# Altium PCB sorad.pcbdoc
Units mil, origin at the board's own origin, x right, y up, seen from the top; angles counter-clockwise.
Board outline 4875 x 2875 mil, 2 copper layers (Top Layer, Bottom Layer); 124 components, 109 nets, 639 pads, 153 vias.
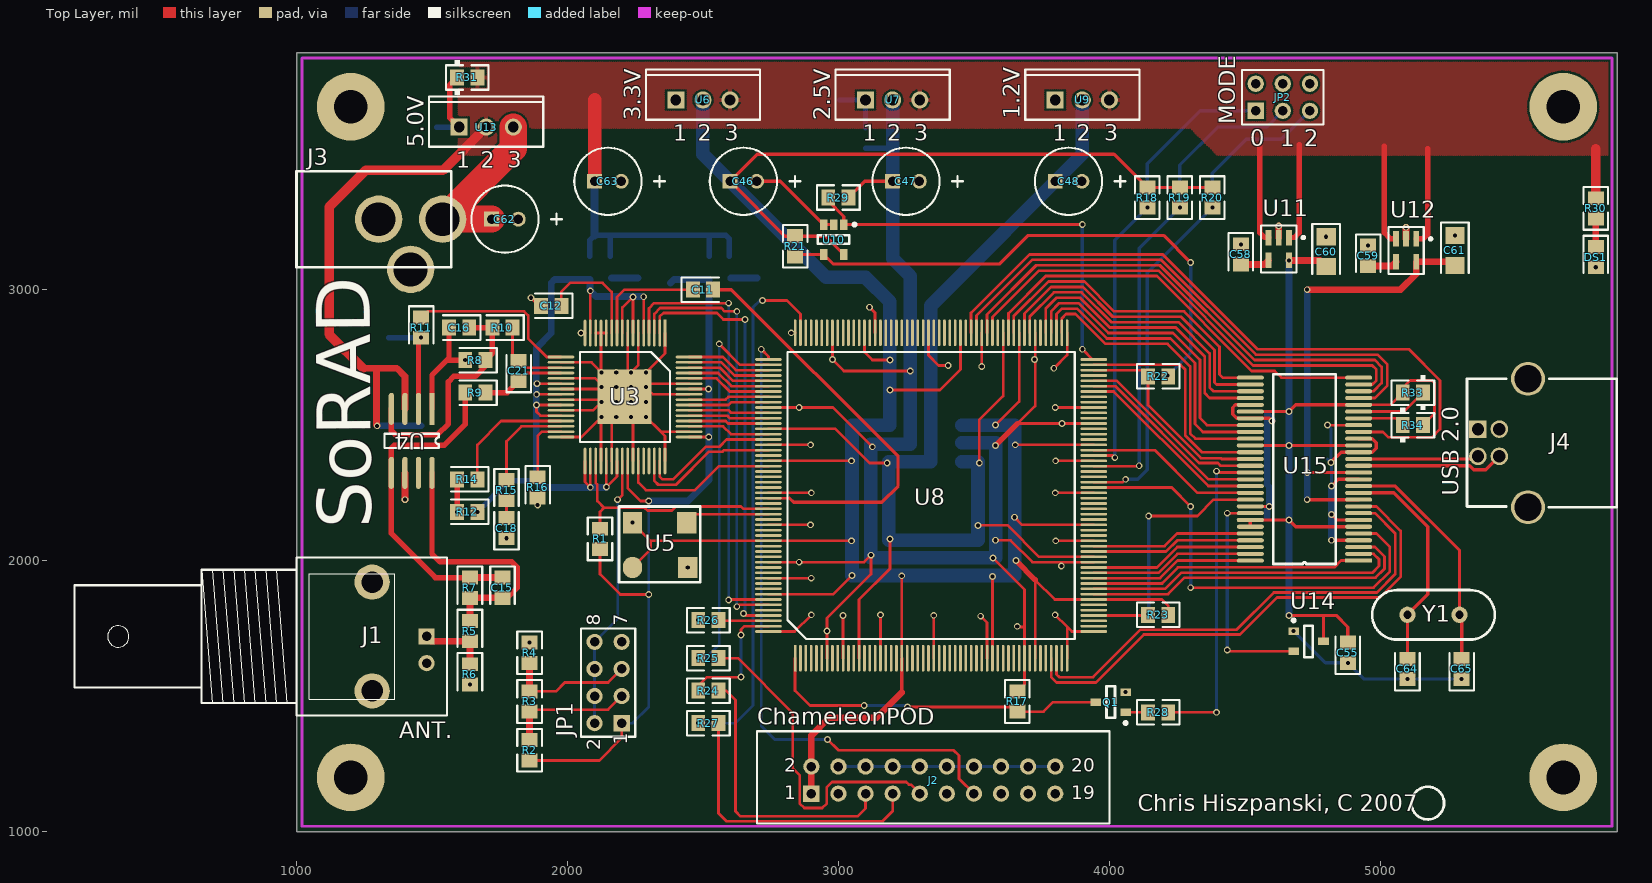
[diagram p0: Top Layer view]
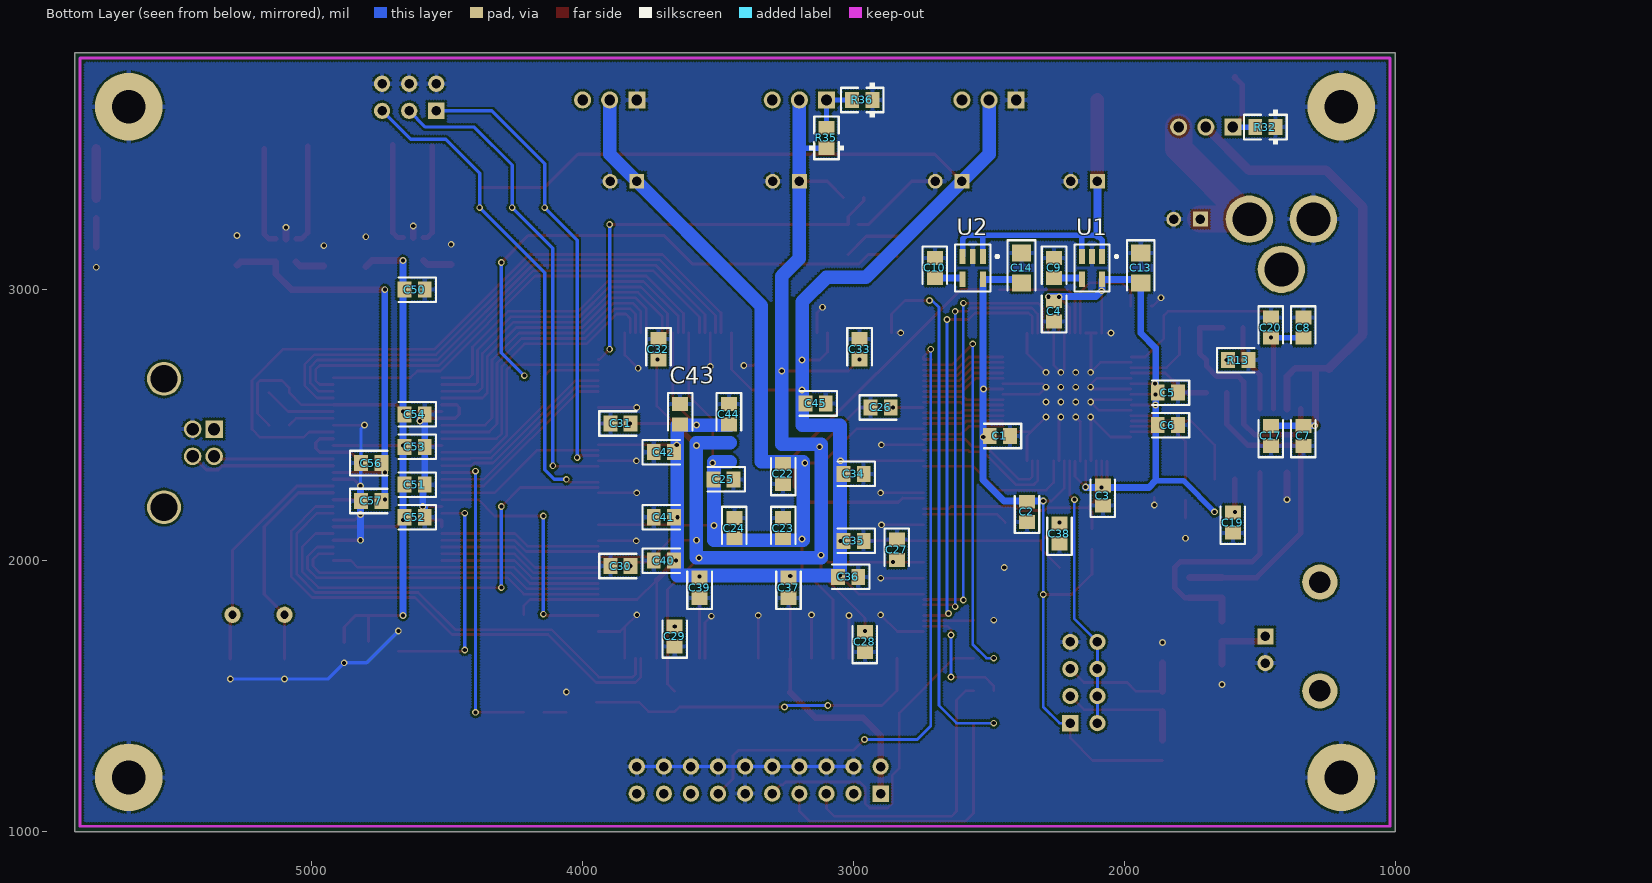
[diagram p1: Bottom Layer view, seen from below]

## Layer stack, top to bottom
Top Layer: signal copper 1.4
Dielectric: dielectric 12.6, FR-4, Dk 4.8
Bottom Layer: signal copper 1.4

## Board outline
1000,1000 5875,1000 5875,3875 1000,3875

## Design rules (kind name [scope] priority, off if disabled: settings)
Clearance [All] p1: gap=8
ComponentClearance [All] p1: gap=10 collisioncheckmode=2
HoleSize [All] p1: absolutevalues=TRUE maxlimit=125 minlimit=15 maxpercent=80.000 minpercent=20.000
MinimumAnnularRing [All] p1: minimumring=5
PolygonConnect [All] p1: connectstyle=Relief reliefconductorwidth=15 reliefentries=4 polygonreliefangle="90 Angle"
RoutingLayers [All] p1: top layer=Horizontal bottom layer=Vertical
RoutingVias [All] p1: holewidth=15 width=25 viastyle="Through Hole" minholewidth=15 minwidth=25 maxholewidth=125 maxwidth=200
SolderMaskExpansion [All] p1: expansion=3
TestPointUsage [All] p1: valid=0 allowmultiple=FALSE
Testpoint [All] p1: side=15 testpointundercomponent=TRUE minsize=40 maxsize=100 preferedsize=60 minholesize=0 maxholesize=40 preferedholesize=32 testpointgrid=1 style=1023 order=1234567890
Width Width_vcc5 [InNet('VCC5')] p1: maxlimit=100 minlimit=6 preferedwidth=100 toplayer_prefwidth=50 bottomlayer_prefwidth=20 minimp=50.000000 maximp=50.000000 favimp=50.000000
Width Width_power [InNet('VCCA') or InNet('VCCD') or InNet('USB_VCCA') or InNet('USB_VCCD') or InNet('VCC12') or InNet('VCC25') or InNet('VCC33')] p2: maxlimit=100 minlimit=10 preferedwidth=25 toplayer_prefwidth=12 bottomlayer_prefwidth=20 minimp=50.000000 maximp=50.000000 favimp=50.000000
Width [All] p3: maxlimit=150 minlimit=6 preferedwidth=8 toplayer_prefwidth=12 bottomlayer_prefwidth=20 minimp=50.000000 maximp=50.000000 favimp=50.000000
15 further rules are at their usual default settings.

## Classes and differential pairs
component class S3: C50 C51 C52 C53 C54 C55 C56 C57 C58 C59 C60 C61 C62 C63 C64 C65 DS1 J3 J4 R30 R31 R32 R33 R34 U11 U12 U13 U14 U15 Y1
component class S2: C22 C23 C24 C25 C26 C27 C28 C29 C30 C31 C32 C33 C34 C35 C36 C37 C38 C39 C40 C41 C42 C43 C44 C45 C46 C47 C48 J2 J? JP2 JP? Q1 R17 R18 R19 R20 R21 R22 R23 R24 R25 R26 R27 R28 R29 R35 R36 U5 U6 U7 U8 U9 U10
component class S1: C1 C2 C3 C4 C5 C6 C7 C8 C9 C10 C11 C12 C13 C14 C15 C16 C17 C18 C19 C20 C21 J1 JP1 R1 R2 R3 R4 R5 R6 R7 R8 R9 R10 R11 R12 R13 R14 R15 R16 U1 U2 U3 U4

## Components (designator, comment, footprint, x,y, rotation, side; value= is the part's Value field where it differs from the comment)
C1 "0.1uF" CC2012-0805 2460,2460 r0 bottom
C2 "0.1uF" CC2012-0805 2360,2180 r90 bottom
C3 "0.1uF" CC2012-0805 2080,2240 r90 bottom
C4 "0.1uF" CC2012-0805 2260,2920 r90 bottom
C5 "0.1uF" CC2012-0805 1840,2620 r0 bottom
C6 "0.1uF" CC2012-0805 1840,2500 r0 bottom
C7 "0.1uF" CC2012-0805 1340,2460 r90 bottom
C8 "0.1uF" CC2012-0805 1340,2860 r270 bottom
C9 "0.01uF" CC2012-0805 2260,3080 r270 bottom
C10 "0.01uF" CC2012-0805 2700,3080 r270 bottom
C11 "0.01uF" CC2012-0805 2500,3000 r0 top
C12 "0.01uF" CC2012-0805 1940,2940 r180 top
C13 "2.2uF" CC3216-1206 1940,3080 r270 bottom
C14 "2.2uF" CC3216-1206 2380,3080 r270 bottom
C15 "2pF" CC2012-0805 1760,1900 r270 top
C16 "2pF" CC2012-0805 1600,2860 r180 top
C17 "1uF" CC2012-0805 1460,2460 r90 bottom
C18 "1uF" CC2012-0805 1775,2120 r90 top
C19 "1uF" CC2012-0805 1600,2140 r90 bottom
C20 "1uF" CC2012-0805 1460,2860 r270 bottom
C21 "56pF" CC2012-0805 1820,2700 r90 top
C22 "0.1uF" CC2012-0805 3260,2320 r90 bottom
C23 "0.1uF" CC2012-0805 3260,2120 r270 bottom
C24 "0.1uF" CC2012-0805 3440,2120 r270 bottom
C25 "0.1uF" CC2012-0805 3480,2300 r0 bottom
C26 "0.1uF" CC2012-0805 2900,2565.2 r180 bottom
C27 "0.1uF" CC2012-0805 2840,2040 r270 bottom
C28 "0.1uF" CC2012-0805 2958.11,1700 r90 bottom
C29 "0.1uF" CC2012-0805 3660,1720 r90 bottom
C30 "0.1uF" CC2012-0805 3860,1980 r180 bottom
C31 "0.1uF" CC2012-0805 3860,2506.14 r180 bottom
C32 "0.1uF" CC2012-0805 3720,2780 r270 bottom
C33 "0.1uF" CC2012-0805 2977.8,2780 r270 bottom
C34 "0.1uF" CC2012-0805 3000,2320 r0 bottom
C35 "0.1uF" CC2012-0805 3000,2073.07 r0 bottom
C36 "0.1uF" CC2012-0805 3020,1940 r0 bottom
C37 "0.1uF" CC2012-0805 3240,1900 r90 bottom
C38 "0.1uF" CC2012-0805 2240,2100 r90 bottom
C39 "0.1uF" CC2012-0805 3568.35,1900 r90 bottom
C40 "0.1uF" CC2012-0805 3700,2000 r180 bottom
C41 "0.1uF" CC2012-0805 3700,2160 r180 bottom
C42 "0.1uF" CC2012-0805 3700,2400 r180 bottom
C43 "0.1uF" CC2012-0805 3640,2540 r270 bottom
C44 "0.1uF" CC2012-0805 3460,2540 r270 bottom
C45 "0.1uF" CC2012-0805 3140,2580 r0 bottom
C46 "22uF" RB6.3 2600,3400 r0 top
C47 "22uF" RB6.3 3200,3400 r0 top
C48 "22uF" RB6.3 3800,3400 r0 top
C50 "0.1uF" CC2012-0805 4620,3000 r0 bottom (schematic designator C53)
C51 "0.1uF" CC2012-0805 4620,2280 r0 bottom (schematic designator C54)
C52 "0.1uF" CC2012-0805 4620,2160 r0 bottom (schematic designator C55)
C53 "0.1uF" CC2012-0805 4620,2420 r0 bottom (schematic designator C56)
C54 "0.1uF" CC2012-0805 4620,2540 r0 bottom (schematic designator C57)
C55 "0.1uF" CC2012-0805 4880,1660 r90 top (schematic designator C58)
C56 "0.1uF" CC2012-0805 4780,2360 r180 bottom (schematic designator C59)
C57 "0.1uF" CC2012-0805 4780,2220 r180 bottom (schematic designator C60)
C58 "0.01uF" CC2012-0805 4485,3130 r270 top (schematic designator C61)
C59 "0.01uF" CC2012-0805 4955,3125 r270 top (schematic designator C62)
C60 "2.2uF" CC3216-1206 4800,3140 r270 top (schematic designator C63)
C61 "2.2uF" CC3216-1206 5275,3145 r270 top (schematic designator C64)
C62 "22uF" RB6.3 1720,3260 r0 top (schematic designator C65)
C63 "22uF" RB6.3 2100,3400 r0 top (schematic designator C66)
C64 "12pF" CC2012-0805 5100,1600 r90 top (schematic designator C67)
C65 "12pF" CC2012-0805 5300,1600 r90 top (schematic designator C68)
DS1 "PWR" CC2012-0805 5795,3120 r270 top
J1 "BNC" "BNC_RA CON" 1480,1720 r0 top locked
J2 "ChameleonPOD" HDR2X10 2900,1140 r0 top
J3 "PJ-002B" PJ-002B 1000,3260 r180 top locked
J4 "USB B RA" AU-Y1007-R 5360,2385 r90 top locked
JP1 "Header 4X2" HDR2X4 2200,1400 r90 top
JP2 "MODE" HDR2X3 4540,3660 r0 top
Q1 "2N7002" SOT-23-3 4060,1440 r180 top
R1 "4.7K" CR2012-0805 2120,2080 r270 top
R2 "4.7K" CR2012-0805 1860,1300 r270 top
R3 "4.7K" CR2012-0805 1860,1480 r270 top
R4 "4.7K" CR2012-0805 1860,1660 r270 top
R5 "118" CC2012-0805 1640,1740 r270 top
R6 "65" CC2012-0805 1640,1580 r270 top
R7 "1.3K" CC2012-0805 1640,1900 r270 top
R8 "1.3K" CC2012-0805 1660,2740 r180 top
R9 "25" CC2012-0805 1660,2620 r180 top
R10 "25" CC2012-0805 1760,2860 r180 top
R11 "10" CC2012-0805 1460,2860 r270 top
R12 "2K" CC2012-0805 1630,2180 r180 top
R13 "147" CC2012-0805 1580,2740 r180 bottom
R14 "1" CC2012-0805 1630,2300 r180 top
R15 "1" CC2012-0805 1775,2260 r270 top
R16 "56.2K" CC2012-0805 1890,2270 r270 top
R17 "4.7K" CR2012-0805 3660,1480 r90 top
R18 "4.7K" CR2012-0805 4140,3340 r270 top
R19 "4.7K" CR2012-0805 4260,3340 r270 top
R20 "4.7K" CR2012-0805 4380,3340 r270 top
R21 "4.7K" CR2012-0805 2840,3160 r90 top
R22 "4.7K" CR2012-0805 4180,2680 r0 top
R23 "4.7K" CR2012-0805 4180,1800 r0 top
R24 "330" CR2012-0805 2520,1520 r0 top
R25 "330" CR2012-0805 2520,1640 r0 top
R26 "330" CR2012-0805 2520,1780 r0 top
R27 "330" CR2012-0805 2520,1400 r0 top
R28 "330" CR2012-0805 4180,1440 r180 top
R29 "330" CR2012-0805 3000,3340 r0 top
R30 "330" CR2012-0805 5795,3300 r90 top
R31 "121" CC2012-0805 1630,3783.03 r0 top
R32 "363" CC2012-0805 1480,3600 r0 bottom
R33 "2.2K" CC2012-0805 5120,2620 r180 top
R34 "2.2K" CC2012-0805 5120,2500 r0 top
R35 "121" CC2012-0805 3100,3560 r90 bottom
R36 "121" CC2012-0805 2968,3700 r0 bottom
U1 "TPS79933" SO-G5/P.95 2120,3080 r0 bottom
U2 "TPS79933" SO-G5/P.95 2560,3080 r0 bottom
U3 "" HQFP64 2360,2840 r270 top locked
U4 "THS4501" SOIC8 1500,2560 r270 top
U5 "25 MHz" CSX750FB 2240,2140 r0 top (schematic designator U6)
U6 "LM1086CT-3.3" SFM-T3/A4.7V 2500,3700 r0 top
U7 "LM1086CT-ADJ" SFM-T3/A4.7V 3200,3700 r0 top
U8 "XC3S500E" PQFP208 2840,1640 r90 top locked
U9 "LM1086CT-ADJ" SFM-T3/A4.7V 3900,3700 r0 top
U10 "SN74AHC1G125" SOT-23-6 3020,3240 r270 top
U11 "TPS79933" SO-G5/P.95 4625,3150 r180 top
U12 "TPS79933" SO-G5/P.95 5095,3145 r180 top
U13 "LM1085IT-ADJ" SFM-T3/A4.7V 1700,3600 r0 top
U14 "MAX809" SOT-23-3 4680,1740 r0 top
U15 "CY7C68013A" SSOP56 4920,2000 r180 top locked
Y1 "24MHz" HC49US 5100,1800 r0 top

## Footprints (in the part's own frame and the unit in brackets; to place one, negate y for a bottom-side part, rotate by r counter-clockwise, add the part's x,y. Pads: shape width x height; smd on the part's side, far side on the other; paste and mask are expansions set on the pad)
AU-Y1007-R [mil]
  rect 65x65 hole 45: 1(100,0)
  round 65 hole 45: 2(0,0) 3(0,-79) 4(100,-79)
  round 125 hole 100: ""(-188,-185) ""(286,-185)
  silkscreen extent -188,-512 286,40
"BNC_RA CON" [mil]
  rect 60x60 hole 35: 1(0,0)
  round 60 hole 35: 2(0,-98.42)
  round 130 hole 79: ""(-200.79,-200.79) ""(-200.79,200.79)
  silkscreen extent -1299,-291 75,291
CC2012-0805 [mm]
  rect 1.3x1.5 smd: 1(-0.95,0) 2(0.95,0)
  silkscreen extent -2,-1.15 1.5,1.15
CC3216-1206 [mm]
  rect 1.6x1.8 smd: 1(-1.4,0) 2(1.4,0)
  silkscreen extent -2.6,-1.3 2.1,1.3
CR2012-0805 [mm]
  rect 1.3x1.5 smd: 1(-0.95,0) 2(0.95,0)
  silkscreen extent -2,-1.15 2,1.15
CSX750FB [mm]
  oval 1.8x2 smd: 1(0,-4.2)
  rect 1.8x2 smd: 2(5.18,-4.2) 3(5.08,0) 4(0,0)
  silkscreen extent -1.27,-5.59 6.35,1.52
HC49US [mil]
  round 60 hole 30: 1(0,0) 2(192.13,0)
  silkscreen extent -130,-92 322,92
HDR2X3 [mil] "Connector; Header; 3x2 Position"
  rect 60x60 hole 35: 1(0,0)
  round 60 hole 35: 2(0,100) 3(100,0) 4(100,100) 5(200,0) 6(200,100)
  silkscreen extent -50,-50 250,150
HDR2X4 [mil] "Connector; Header; 4x2 Position"
  rect 60x60 hole 35: 1(0,0)
  round 60 hole 35: 2(0,100) 3(100,0) 4(100,100) 5(200,0) 6(200,100) 7(300,0) 8(300,100)
  silkscreen extent -50,-50 350,150
HDR2X10 [mil]
  rect 60x60 hole 35: 1(0,0)
  round 60 hole 35: 2(0,100) 3(100,0) 4(100,100) 5(200,0) 6(200,100) 7(300,0) 8(300,100) 9(400,0) 10(400,100) 11(500,0) 12(500,100) 13(600,0) 14(600,100) 15(700,0) 16(700,100) 17(800,0) 18(800,100) 19(900,0) 20(900,100)
  silkscreen extent -200,-110 1100,230
HQFP64 [mm]
  rect 2.5x0.25 smd: 1(0,0)
  oval 2.5x0.25 smd: 2(0,-0.5) 3(0,-1) 4(0,-1.5) 5(0,-2) 6(0,-2.5) 7(0,-3) 8(0,-3.5) 9(0,-4) 10(0,-4.5) 11(0,-5) 12(0,-5.5) 13(0,-6) 14(0,-6.5) 15(0,-7) 16(0,-7.5) 33(12,-7.5) 34(12,-7) 35(12,-6.5) 36(12,-6) 37(12,-5.5) 38(12,-5) 39(12,-4.5) 40(12,-4) 41(12,-3.5) 42(12,-3) 43(12,-2.5) 44(12,-2) 45(12,-1.5) 46(12,-1) 47(12,-0.5) 48(12,0)
  oval 0.25x2.5 smd: 17(2.25,-9.75) 18(2.75,-9.75) 19(3.25,-9.75) 20(3.75,-9.75) 21(4.25,-9.75) 22(4.75,-9.75) 23(5.25,-9.75) 24(5.75,-9.75) 25(6.25,-9.75) 26(6.75,-9.75) 27(7.25,-9.75) 28(7.75,-9.75) 29(8.25,-9.75) 30(8.75,-9.75) 31(9.25,-9.75) 32(9.75,-9.75) 49(9.75,2.25) 50(9.25,2.25) 51(8.75,2.25) 52(8.25,2.25) 53(7.75,2.25) 54(7.25,2.25) 55(6.75,2.25) 56(6.25,2.25) 57(5.75,2.25) 58(5.25,2.25) 59(4.75,2.25) 60(4.25,2.25) 61(3.75,2.25) 62(3.25,2.25) 63(2.75,2.25) 64(2.25,2.25)
  silkscreen extent 1.79,-7.96 10.21,0.47
PJ-002B [mm]
  round 4.445 hole 3.175: 1(-13.7,0) 2(-7.7,0) 3(-10.7,4.7)
  silkscreen extent -14.5,-4.5 0,4.5
PQFP208 [mm]
  rect 2.5x0.25 smd: 1(0,0)
  oval 2.5x0.25 smd: 2(0,-0.5) 3(0,-1) 4(0,-1.5) 5(0,-2) 6(0,-2.5) 7(0,-3) 8(0,-3.5) 9(0,-4) 10(0,-4.5) 11(0,-5) 12(0,-5.5) 13(0,-6) 14(0,-6.5) 15(0,-7) 16(0,-7.5) 17(0,-8) 18(0,-8.5) 19(0,-9) 20(0,-9.5) 21(0,-10) 22(0,-10.5) 23(0,-11) 24(0,-11.5) 25(0,-12) 26(0,-12.5) 27(0,-13) 28(0,-13.5) 29(0,-14) 30(0,-14.5) 31(0,-15) 32(0,-15.5) 33(0,-16) 34(0,-16.5) 35(0,-17) 36(0,-17.5) 37(0,-18) 38(0,-18.5) 39(0,-19) 40(0,-19.5) 41(0,-20) 42(0,-20.5) 43(0,-21) 44(0,-21.5) 45(0,-22) 46(0,-22.5) 47(0,-23) 48(0,-23.5) 49(0,-24) 50(0,-24.5) 51(0,-25) 52(0,-25.5) 105(30.5,-25.5) 106(30.5,-25) 107(30.5,-24.5) 108(30.5,-24) 109(30.5,-23.5) 110(30.5,-23) 111(30.5,-22.5) 112(30.5,-22) 113(30.5,-21.5) 114(30.5,-21) 115(30.5,-20.5) 116(30.5,-20) 117(30.5,-19.5) 118(30.5,-19) 119(30.5,-18.5) 120(30.5,-18) 121(30.5,-17.5) 122(30.5,-17) 123(30.5,-16.5) 124(30.5,-16) 125(30.5,-15.5) 126(30.5,-15) 127(30.5,-14.5) 128(30.5,-14) 129(30.5,-13.5) 130(30.5,-13) 131(30.5,-12.5) 132(30.5,-12) 133(30.5,-11.5) 134(30.5,-11) 135(30.5,-10.5) 136(30.5,-10) 137(30.5,-9.5) 138(30.5,-9) 139(30.5,-8.5) 140(30.5,-8) 141(30.5,-7.5) 142(30.5,-7) 143(30.5,-6.5) 144(30.5,-6) 145(30.5,-5.5) 146(30.5,-5) 147(30.5,-4.5) 148(30.5,-4) 149(30.5,-3.5) 150(30.5,-3) 151(30.5,-2.5) 152(30.5,-2) 153(30.5,-1.5) 154(30.5,-1) 155(30.5,-0.5) 156(30.5,0)
  oval 0.25x2.5 smd: 53(2.5,-28) 54(3,-28) 55(3.5,-28) 56(4,-28) 57(4.5,-28) 58(5,-28) 59(5.5,-28) 60(6,-28) 61(6.5,-28) 62(7,-28) 63(7.5,-28) 64(8,-28) 65(8.5,-28) 66(9,-28) 67(9.5,-28) 68(10,-28) 69(10.5,-28) 70(11,-28) 71(11.5,-28) 72(12,-28) 73(12.5,-28) 74(13,-28) 75(13.5,-28) 76(14,-28) 77(14.5,-28) 78(15,-28) 79(15.5,-28) 80(16,-28) 81(16.5,-28) 82(17,-28) 83(17.5,-28) 84(18,-28) 85(18.5,-28) 86(19,-28) 87(19.5,-28) 88(20,-28) 89(20.5,-28) 90(21,-28) 91(21.5,-28) 92(22,-28) 93(22.5,-28) 94(23,-28) 95(23.5,-28) 96(24,-28) 97(24.5,-28) 98(25,-28) 99(25.5,-28) 100(26,-28) 101(26.5,-28) 102(27,-28) 103(27.5,-28) 104(28,-28) 157(28,2.5) 158(27.5,2.5) 159(27,2.5) 160(26.5,2.5) 161(26,2.5) 162(25.5,2.5) 163(25,2.5) 164(24.5,2.5) 165(24,2.5) 166(23.5,2.5) 167(23,2.5) 168(22.5,2.5) 169(22,2.5) 170(21.5,2.5) 171(21,2.5) 172(20.5,2.5) 173(20,2.5) 174(19.5,2.5) 175(19,2.5) 176(18.5,2.5) 177(18,2.5) 178(17.5,2.5) 179(17,2.5) 180(16.5,2.5) 181(16,2.5) 182(15.5,2.5) 183(15,2.5) 184(14.5,2.5) 185(14,2.5) 186(13.5,2.5) 187(13,2.5) 188(12.5,2.5) 189(12,2.5) 190(11.5,2.5) 191(11,2.5) 192(10.5,2.5) 193(10,2.5) 194(9.5,2.5) 195(9,2.5) 196(8.5,2.5) 197(8,2.5) 198(7.5,2.5) 199(7,2.5) 200(6.5,2.5) 201(6,2.5) 202(5.5,2.5) 203(5,2.5) 204(4.5,2.5) 205(4,2.5) 206(3.5,2.5) 207(3,2.5) 208(2.5,2.5)
  silkscreen extent 1.79,-26.21 28.71,0.72
RB6.3 [mil]
  rect 55x55 hole 35: 1(0,0)
  round 55 hole 35: 2(98.43,0)
  silkscreen extent -75,-124 260,124
SFM-T3/A4.7V [mm]
  rect 1.6x1.6 hole 1: 1(-2.54,0)
  round 1.6 hole 1: 2(0,0) 3(2.54,0)
  silkscreen extent -5.35,-1.85 5.35,2.85
SO-G5/P.95 [mm]
  rect 0.55x1.45 smd: 1(-0.95,-1.075) 2(0,-1.075) 3(0.95,-1.075) 4(0.95,1.075) 5(-0.95,1.075)
  silkscreen extent -2.42,-2.2 1.65,2.2
SOIC8 [mm]
  rect 3x0.5 smd: 1(0,0)
  oval 3x0.5 smd: 2(0,-1.27) 3(0,-2.54) 4(0,-3.81) 5(6,-3.81) 6(6,-2.54) 7(6,-1.27) 8(6,0)
  silkscreen extent 2.34,-4.44 3.67,0.64
SOT-23-3 [mm]
  rect 1x0.7 smd: 1(0,0) 2(0,-1.9) 3(2.8,-0.95)
  silkscreen extent -0.15,-2.45 1.8,1.15
SOT-23-6 [mm]
  rect 1x0.7 smd: 1(0,0) 2(0,-0.95) 3(0,-1.9) 4(2.8,-1.9) 5(2.8,0)
  silkscreen extent -0.15,-2.45 1.8,1.15
SSOP56 [mil]
  rect 100x15 smd: 1(0,0)
  oval 100x15 smd: 2(0,-25) 3(0,-50) 4(0,-75) 5(0,-100) 6(0,-125) 7(0,-150) 8(0,-175) 9(0,-200) 10(0,-225) 11(0,-250) 12(0,-275) 13(0,-300) 14(0,-325) 15(0,-350) 16(0,-375) 17(0,-400) 18(0,-425) 19(0,-450) 20(0,-475) 21(0,-500) 22(0,-525) 23(0,-550) 24(0,-575) 25(0,-600) 26(0,-625) 27(0,-650) 28(0,-675) 29(400,-675) 30(400,-650) 31(400,-625) 32(400,-600) 33(400,-575) 34(400,-550) 35(400,-525) 36(400,-500) 37(400,-475) 38(400,-450) 39(400,-425) 40(400,-400) 41(400,-375) 42(400,-350) 43(400,-325) 44(400,-300) 45(400,-275) 46(400,-250) 47(400,-225) 48(400,-200) 49(400,-175) 50(400,-150) 51(400,-125) 52(400,-100) 53(400,-75) 54(400,-50) 55(400,-25) 56(400,0)
  silkscreen extent 85,-688 315,13

## Part data
C1 C2 C3 C4 C5 C6 C7 C8 C9 C10 C11 C12 C13 C14 C15 C16 C17 C18 C19 C20 C21 C22 C23 C24 C25 C26 C27 C28 C29 C30 C31 C32 C33 C34 C35 C36 C37 C38 C39 C40 C41 C42 C43 C44 C45 C46 C47 C48 C50 C51 C52 C53 C54 C55 C56 C57 C58 C59 C60 C61 C64 C65: library part Cap, "Capacitor"
C62 C63: library part "Cap Pol1", "Polarized Capacitor (Radial)"
DS1: library part LED0, "Typical INFRARED GaAs LED"
J1: "BNC Elbow Connector"
J2: library part "Header 10X2", "Header, 10-Pin, Dual row"
J3: library part PB-002B, "R/A PCB Mount Power Jack"
J4: library part "Header 4", "Header, 4-Pin"
JP1: "Header, 4-Pin, Dual row"
JP2: library part "Header 3X2", "Header, 3-Pin, Dual row"
Q1: library part MOSFET-N, "N-Channel MOSFET"
R1 R2 R3 R4 R5 R6 R7 R8 R9 R10 R11 R12 R13 R14 R15 R16 R17 R18 R19 R20 R21 R22 R23 R24 R25 R26 R27 R28 R29 R30 R31 R32 R35 R36: library part Res1, "Resistor"
U1 U2 U7 U9 U11 U12: library part TPS799xx, "LDO Voltage Regulator"
U3: library part ADS5520, "ADC 12BIT 125MSPS"
U4: "Differential Amplifier"
U5: library part CWX815-100.0M, "CWX815-100.0M"
U6: library part LM317HVT, "3-Terminal Adjustable Regulator"
U8: "Xilinx Spartan-3E FPGA"
U10: "Single 3-state buffer"
U13: library part LM1086CT, "Voltage Regulator"
U14: "POR Supervisory Circuit"
U15: "EZ-USB FX2LP USB Microcontroller (56-SSOP)"
Y1: library part XTAL, "Crystal Oscillator"

## Free pads (board coordinates)
  rect 200x200 smd: 0(2210,2605)
  round 250 hole 125: ""(1200,1200) ""(1200,3675) ""(5675,1200) ""(5675,3675)

## Via types
v1: diameter 25, hole 15, Top Layer to Bottom Layer, 153 vias

## Nets (pads, with @x,y where several pads share a name; then routed paths per layer and width w, separated by ;. In a path a pad name is that pad's centre, name@x,y a point inside that pad or via, vN(x,y) a via of type N, cw(c..) or ccw(c..) an arc to the next point about the centre after c; other vN are vias at no path point)
GND: C1.1 C2.1 C3.1 C4.1 C5.1 C6.1 C7.1 C8.1 C9.1 C10.1 C12.2 C13.1 C14.1 C17.1 C18.1 C19.1 C20.1 C22.1 C23.1 C24.1 C25.1 C26.1 C27.1 C28.1 C29.1 C30.1 C31.1 C32.1 C33.1 C34.1 C35.1 C36.1 C37.1 C38.1 C39.1 C40.1 C41.1 C42.1 C43.1 C44.1 C45.1 C46.2 C47.2 C48.2 C50.1 C51.1 C52.1 C53.1 C54.1 C55.1 C56.1 C57.1 C58.1 C59.1 C60.1 C61.1 C62.2 C63.2 C64.1 C65.1 DS1.2 J1.2 J2.4 J2.6 J2.8 J2.10 J2.11 J2.12 J2.14 J2.16 J2.18 J2.20 J3.2 J4.4 JP1.7 JP2.2 JP2.4 JP2.6 pad. pad.0 Q1.2 R4.1 R6.2 R13.2 R16.2 R26.1 R32.1 R36.1 U1.2 U2.2 U3.1 U3.6 U3.8 U3.12 U3.13 U3.14 U3.16 U3.18 U3.21 U3.23 U3.25 U3.27 U3.32 U3.36 U3.38 U3.42 U3.48 U3.50 U3.57 U3.59 U4.6 U5.2 U6.1 U8.10 U8.17 U8.27 U8.37 U8.52 U8.53 U8.70 U8.79 U8.85 U8.95 U8.105 U8.121 U8.131 U8.141 U8.156 U8.173 U8.182 U8.188 U8.198 U8.208 U9.1 U10.2 U10.3 U11.2 U12.2 U14.1 U15.4 U15.7 U15.13 U15.17 U15.19 U15.21 U15.33 U15.35 U15.48 | length 11895
  Top Layer w10: v1(1865,2970) 1895,2940 C12.2 ; v1(1890,2205) R16.2 ; U3.32 2051.14,2456.14 2123.78,2528.78 U3.36 ; U3.27 2094.57,2554.57 v1(2125,2585) ; U3.25 pad.0@2116.06,2593.94 ; U3.23 pad.0@2118.31,2633.31 ; U3.21 2102.68,2672.68 pad.0@2125,2650.36 ; U3.18 2088.27,2731.73 2123.78,2696.22 U3.13 ; v1(2050,2840) U3.16 ; U3.14 U3.13 ; U3.12 U3.13 ; U3.38 pad.0@2163.15,2513.15 ; U3.8 2222.21,2707.79 v1(2235,2695) 2261.58,2721.58 U3.6 ; U3.42 pad.0@2241.89,2523.11 ; v1(2290,2530) 2344.17,2475.83 ; v1(2290,2695) 2360,2765 U3.1 ; U3.48 2360,2460 2344.17,2475.83 ; U3.50 2344.17,2475.83 ; U3.57 2316.38,2613.62 v1(2290,2640) 2302.99,2652.99 U3.59 ; U8.208 2838.43,1738.43 v1(2900,1800) ; U8.198 v1(2899.72,1935.28) ; U8.188 v1(2897.13,2132.13) ; U8.182 v1(2899.76,2250.24) ; U8.173 v1(2897.4,2427.4) ; v1(2825.79,2840.79) U8.156 ; U8.10 v1(3017.17,1797.17) ; v1(3115,2935) 3135.28,2914.72 U8.141 ; U8.17 v1(3154.96,1799.96) ; U8.131 3332.13,2757.87 3370,2720 v1(3405,2720) ; U8.27 v1(3351.81,1798.19) ; v1(3525,1795) 3548.66,1771.34 U8.37 ; v1(3528.98,2716.02) U8.121 ; v1(3795,2710) 3843.94,2758.94 U8.105 ; v1(3800,1800) 3843.94,1756.06 ; v1(3800.2,2565.2) U8.95 ; v1(3800.24,2250.24) U8.79 ; v1(3801.65,2368.35) U8.85 ; v1(3801.93,2073.07) U8.70 ; U8.52 3843.94,1756.06 ; U8.53 3861.57,1738.43 3843.94,1756.06 ; v1(4805,2500) U15.21
  Top Layer w12: pad.0@2116.06,2593.94 v1(2125,2585) ; pad.0@2118.31,2633.31 v1(2125,2640) pad.0@2125,2650.36 ; pad.0@2123.78,2528.78 v1(2125,2530) ; pad.0@2123.78,2696.22 v1(2125,2695) ; pad.0@2163.15,2513.15 v1(2180,2530) ; v1(2235,2530) pad.0@2241.89,2523.11 ; C46.2 2785.2,3400 U10.3 U10.2 ; U15.48 v1(4590,2200) ; U15.33 4465,2575 4455,2565 4455,2540 4470,2525 U15.35 4590,2525 v1(4600,2515) ; v1(4817.4,2362.4) 4855,2400 U15.17 4970,2400 4985,2415 4985,2435 4970,2450 U15.19 ; v1(4820,2075) U15.4 ; v1(4820,2170) 4840,2150 U15.7 ; v1(4820,2275) 4845,2300 U15.13
  Top Layer w25: v1(1400,2225) U4.6 ; U11.2 v1(4625,3235) ; U12.2 v1(5095,3230)
  Bottom Layer w12: J2.6 J2.4 ; J2.8 J2.4 ; J2.10 J2.4 ; J2.12 J2.4 ; J2.14 J2.4 ; J2.16 J2.4 ; J2.20 J2.18 J2.4 ; v1(4680,1740) 4797.4,1622.6 v1(4880,1622.6) 4940,1562.6 v1(5300,1562.6) ; C56.1@4805,2374.8 v1(4817.4,2362.4) ; v1(4805,2500) 4817.4,2487.6 v1(4817.4,2362.4) ; v1(4820,2275) 4820,2359.8 4818.6,2361.2 v1(4817.4,2362.4)
  Bottom Layer w25: C52.1 4582.6,2192.6 v1(4590,2200) 4590,2272.6 C51.1 ; C53.1 C51.1 ; v1(4600,2515) 4600,2522.6 C54.1 4582.6,2515 C51.1 ; v1(4820,2075) v1(4820,2170) 4820,2217.4 C57.1 4820,2222.6 v1(4820,2275)
  other v1: 4060,1514.8 1640,1542.6 5100,1562.6 1860,1697.4 2482.6,1780 2443.94,1974.65 1775,2082.6 2180,2585 2235,2585 2290,2585 2180,2640 2235,2640 2180,2695 5795,3082.6 4955,3162.4 4485,3167.4 4800,3195.12 5275,3200.12
M0: JP2.1 R18.2 U8.86 | length 1703.5
  Top Layer w10: U8.86 4011.97,2388.03 v1(4020,2380)
  Bottom Layer w10: v1@4015,2385 v1(4020,2380)
  Bottom Layer w12: v1(4020,2380) 4020,3182.6 v1(4140,3302.6) 4140,3465 4335,3660 JP2.1
M1: JP2.3 R19.2 U8.84 | length 1803.2
  Top Layer w10: U8.84 4108.66,2348.66 v1(4110,2350)
  Bottom Layer w12: v1(4110,2350) 4110,3152.6 v1(4260,3302.6) 4260,3460 4400,3600 4580,3600 JP2.3
M2: JP2.5 R20.2 U8.81 | length 1866.1
  Top Layer w10: U8.81 4049.61,2289.61 v1(4060,2300)
  Bottom Layer w12: v1(4060,2300) 4105,2300 4140,2335 4140,3062.6 v1(4380,3302.6) 4380,3430 4505,3555 4635,3555 JP2.5
NetC8_2: C8.2 C20.2 R11.2 U4.2 | length 386.7
  Top Layer w20: U4.2 1450,2812.6 v1(1460,2822.6)
  Bottom Layer w20: C8.2 v1(1460,2822.6)
NetC9_2: C9.2 U1.4 | length 104.6
  Bottom Layer w12: U1.4 U1.4@2162.32,3042.6
  Bottom Layer w25: U1.4@2162.32,3042.6 C9.2
NetC10_2: C10.2 U2.4 | length 104.6
  Bottom Layer w12: U2.4 U2.4@2602.32,3042.6
  Bottom Layer w25: U2.4@2602.32,3042.6 C10.2
NetC11_1: C11.1 U3.10 | length 423.8
  Top Layer w10: U3.10 2182.84,2972.84 2210,3000 C11.1
NetC11_2: C11.2 U8.183 | length 1557.1
  Top Layer w10: U8.183 2819.45,2230.55
  Top Layer w12: C11.2 2605,3000 3220,2385 3220,2275 3160,2215 2835,2215 2819.45,2230.55
NetC12_1: C12.1 U3.11 | length 417.2
  Top Layer w10: C12.1 1977.4,2992.4 2010,3025 2130,3025 2163.15,2991.85 U3.11
NetC15_1: C15.1 R7.1 R9.2 U4.5 | length 1218.6
  Top Layer w20: R9.2 1622.6,2502.6 1545,2425 1360,2425 1350,2415 1350,2100 1512.6,1937.4 R7.1
  Top Layer w25: R7.1 C15.1
NetC15_2: C15.2 R5.1 R7.2 U4.8 | length 985.2
  Top Layer w20: U4.8 1500,2025 1530,1995 1795,1995 1815,1975 1815,1900 1777.6,1862.6 C15.2
  Top Layer w25: R5.1 R7.2 C15.2
NetC16_1: C16.1 R8.1 R10.2 U4.4 | length 867.2
  Top Layer w20: U4.4 1350,2480 1365,2465 1520,2465 1560,2505 1560,2660 1580,2680 1660,2680 1697.4,2717.4 R8.1 1722.6,2765.2 R10.2 C16.1
NetC16_2: C16.2 R8.2 R13.1 U4.1 | length 393.5
  Top Layer w20: U4.1 1500,2685 1562.6,2747.6 C16.2 ; 1555,2740 v1(1622.6,2740)
NetC18_2: C18.2 R15.2 | length 65.2
  Top Layer w10: C18.2 R15.2
NetC19_2: C19.2 R12.2 R14.2 | length 120
  Top Layer w20: v1(1592.6,2180) R14.2
NetC21_1: C21.1 R9.1 U3.20 | length 308.7
  Top Layer w10: C21.1 1849.76,2692.36 U3.20
  Top Layer w20: R9.1 1777.4,2620 C21.1
NetC21_2: C21.2 R10.1 U3.19 | length 298.6
  Top Layer w10: R10.1 1797.4,2760 1845.35,2712.05 U3.19
NetC58_2: C58.2 U11.4 | length 108.8
  Top Layer w25: C58.2 4572.52,3092.6 U11.4
NetC59_2: C59.2 U12.4 | length 108.8
  Top Layer w25: C59.2 5042.52,3087.6 U12.4
NetC62_1: C62.1 J3.1 U13.3 | length 628.6
  Top Layer w100: C62.1 J3.1 1800,3520.63 U13.3
NetC64_2: C64.2 U15.11 Y1.1 | length 825.4
  Top Layer w12: U15.11 5050,2250 5175,2125 5175,1875 Y1.1 C64.2
NetC65_2: C65.2 U15.12 Y1.2 | length 874.1
  Top Layer w12: U15.12 5055,2275 5292.13,2037.87 Y1.2 5300,1792.13 C65.2
NetDS1_1: DS1.1 R30.1 | length 105.2
  Top Layer w25: DS1.1 R30.1
NetJ1_1: J1.1 R5.2 R6.1 | length 252.4
  Top Layer w25: J1.1 1497.4,1702.6 R5.2 R6.1
NetJ4_2: J4.2 U15.16 | length 444.1
  Top Layer w12: U15.16 5350,2375 J4.2
NetJ4_3: J4.3 U15.15 | length 545.9
  Top Layer w12: U15.15 5329.39,2350 5344.39,2335 5389,2335 J4.3
NetJP1_2: JP1.2 JP1.4 JP1.6 JP1.8 U3.40 | length 1010
  Top Layer w10: v1(2185,2225) 2202.52,2242.52 U3.40
  Bottom Layer w10: JP1.2 JP1.8 2185,1785 v1(2185,2225)
NetJP1_3: JP1.3 R2.1 R3.2 | length 469
  Top Layer w10: R3.2 1867.4,1450 2150,1450 JP1.3
  Top Layer w25: R2.1 R3.2
NetJP1_5: JP1.5 R3.1 R4.2 | length 479.4
  Top Layer w10: R3.1 1957.4,1517.4 1990,1550 2150,1550 JP1.5
  Top Layer w25: R3.1 R4.2
NetQ1_1: Q1.1 R28.2 | length 82.6
  Top Layer w10: Q1.1 R28.2
NetQ1_3: Q1.3 R17.1 U8.1 | length 1276.2
  Top Layer w10: U8.1 2840,1520 2895,1465 v1(3095,1465) ; v1(3255,1460) 3642.6,1460 R17.1 3757.6,1442.6 3792.4,1477.4 Q1.3
  Bottom Layer w10: v1(3095,1465) 3250,1465 v1(3255,1460)
NetR1_1: R1.1 U3.35 U8.185 | length 889.8
  Top Layer w10: U3.35 2104.1,2286.8 2110,2280.89 2110,2220 2135,2195 ; R1.1 2120,2180 2135,2195 ; U8.185 2648.82,2191.18 2640,2200 2400,2200 2385,2185 2295,2185 2285,2195 2135,2195
NetR11_1: R11.1 U3.17 | length 645.1
  Top Layer w10: R11.1 1482.6,2920 1840,2920 1855,2905 1855,2820 1923.58,2751.42 U3.17
NetR14_1: R14.1 U3.29 | length 472.5
  Top Layer w10: R14.1 1667.4,2427.4 1755.2,2515.2 U3.29
NetR15_1: R15.1 U3.30 | length 366.7
  Top Layer w10: R15.1 1775,2440 1830.51,2495.51 U3.30
NetR16_1: R16.1 U3.31 | length 245.3
  Top Layer w10: R16.1 1890,2460 1905.83,2475.83 U3.31
NetR21_1: R21.1 R22.2 U10.4 | length 2018.5
  Top Layer w10: v1(4215,2682.4) R22.2
  Top Layer w12: R21.1 2847.17,3129.76 U10.4 2980,3095 3595,3095 3700,3200 4200,3200 v1(4300,3100)
  Bottom Layer w12: v1(4215,2682.4) 4300,2767.4 v1(4300,3100)
NetR22_1: R22.1 U8.102 U15.41 | length 775.7
  Top Layer w10: U8.102 4119.61,2702.99 R22.1 4142.6,2573.77 4338.37,2378 4412,2378 4415,2375 U15.41
NetR23_1: R23.1 U8.56 U15.47 | length 967.1
  Top Layer w10: U8.56 4140.08,1797.48 R23.1 v1(4145,1802.4) ; v1(4145,2165) 4325,2165 4385,2225 U15.47
  Bottom Layer w12: v1(4145,1802.4) v1(4145,2165)
NetR24_1: R24.1 U8.207 | length 470.4
  Top Layer w10: R24.1 2482.6,1537.6 2515,1570 v1(2640,1570) ; v1(2640,1725) 2640,1745 2653.11,1758.11 U8.207
  Bottom Layer w10: v1(2640,1570) v1(2640,1725)
NetR25_1: R25.1 U8.158 | length 1421.7
  Top Layer w10: v1(2560,2800) 2637.32,2722.68 U8.158
  Bottom Layer w10: v1(2482.6,1640) 2510,1640 2560,1690 v1(2560,2800)
NetR26_2: R26.2 U8.206 | length 185.1
  Top Layer w10: R26.2 2559.61,1777.8 U8.206
NetR27_1: R27.1 U8.155 | length 1981.5
  Top Layer w10: v1(2720,2960) 2810,2960 2859.69,2910.31 U8.155
  Bottom Layer w10: v1(2482.6,1400) 2620,1400 2685,1465 2685,2935 2710,2960 v1(2720,2960) v1@2715,2955
NetR28_1: R28.1 U15.43 | length 1194.7
  Top Layer w10: R28.1 v1(4395,1440) ; v1(4395,2330) 4400,2325 U15.43
  Bottom Layer w12: v1(4395,1440) v1(4395,2330)
NetR29_1: R29.1 U8.104 U10.1 | length 1521.7
  Top Layer w10: v1(3900,2780) 3937.64,2742.36 U8.104
  Top Layer w12: R29.1 2962.6,3327.4 3020,3270 U10.1 v1(3900,3240)
  Bottom Layer w12: v1(3900,2780) v1(3900,3240)
NetR31_1: R31.1 R32.2 U13.1 | length 291.6
  Top Layer w20: R31.1@1592.6,3782.6 1565,3755 1565,3635 U13.1
  Top Layer w25: R31.1@1592.6,3782.6 R31.1
  Bottom Layer w20: R32.2 U13.1
NetR33_1: R33.1 U15.23 | length 266.4
  Top Layer w10: U15.23 5087.4,2550 R33.1
NetR34_1: R34.1 U15.22 | length 173
  Top Layer w10: U15.22 5057.6,2525 R34.1
NetR35_2: R35.2 R36.2 U7.1 | length 197.2
  Bottom Layer w20: R36.2 U7.1 R35.2
NetU3_2: U3.2 U8.205 | length 1572.4
  Top Layer w10: U3.2 2340.32,2900.32 2354,2914 2551,2914 2575,2890 v1(2655,2890) ; v1(2650,1805) 2657.52,1797.48 U8.205
  Bottom Layer w10: v1(2650,1805) 2655,1810 v1(2655,2890)
NetU3_3: U3.3 U8.203 | length 1598.2
  Top Layer w10: U3.3 2320.63,2910.63 2342,2932 2568,2932 2580,2920 v1(2625,2920) ; v1(2625,1830) 2631.85,1836.85 U8.203
  Bottom Layer w10: v1(2625,1830) v1(2625,2920)
NetU3_4: U3.4 U8.202 | length 1635.1
  Top Layer w10: U3.4 2300.95,2930.95 2320,2950 v1(2595,2950) ; v1(2595,1855) 2596.54,1856.54 U8.202
  Bottom Layer w10: v1(2595,1855) v1(2595,2950)
NetU3_43: U3.43 U8.177 | length 607.6
  Top Layer w10: U3.43 2261.58,2288.42 2290,2260 2470,2260 2558.66,2348.66 U8.177
NetU3_46: U3.46 U8.174 | length 553
  Top Layer w10: U3.46 2320.63,2294.37 2335,2280 2400,2280 2522,2402 2572,2402 2577.72,2407.72 U8.174
NetU3_47: U3.47 U8.172 | length 524.1
  Top Layer w10: U3.47 2340.32,2309.68 2350,2300 2390,2300 2510,2420 2560,2420 2587.09,2447.09 U8.172
NetU3_51: U3.51 U8.171 | length 304.9
  Top Layer w10: U3.51 2574.49,2495.51 2603.23,2466.77 U8.171
NetU3_52: U3.52 U8.169 | length 296.7
  Top Layer w10: U3.52 2583.89,2515.2 2592.95,2506.14 U8.169
NetU3_53: U3.53 U8.168 | length 296.7
  Top Layer w10: U3.53 2589.66,2534.88 2598.72,2525.83 U8.168
NetU3_54: U3.54 U8.167 | length 296.7
  Top Layer w10: U3.54 2595.43,2554.57 2604.49,2545.51 U8.167
NetU3_55: U3.55 U8.165 | length 297.4
  Top Layer w10: U3.55 2594.25,2574.25 2604.88,2584.88 U8.165
NetU3_56: U3.56 U8.164 | length 297.4
  Top Layer w10: U3.56 2583.94,2593.94 2594.57,2604.57 U8.164
NetU3_60: U3.60 U8.163 | length 313.1
  Top Layer w10: U3.60 2550.5,2672.68 2598.93,2624.25 U8.163
NetU3_61: U3.61 U8.162 | length 313.1
  Top Layer w10: U3.61 2556.27,2692.36 2604.7,2643.94 U8.162
NetU3_62: U3.62 U8.161 | length 313.1
  Top Layer w10: U3.62 2562.04,2712.05 2610.47,2663.62 U8.161
NetU3_63: U3.63 U8.160 | length 313.1
  Top Layer w10: U3.63 2567.81,2731.73 2616.24,2683.31 U8.160
NetU3_64: U3.64 U8.159 | length 313.1
  Top Layer w10: U3.64 2573.58,2751.42 2622.01,2702.99 U8.159
NetU5_3: U5.3 U8.186 | length 314.6
  Top Layer w10: U5.3 2471.5,2171.5 U8.186
NetU8_49: U8.49 U15.9 | length 1892.2
  Top Layer w10: U8.49 3784.88,1570.12 3805,1550 3950,1550 4127,1727 4482,1727 4619,1864 4999,1864 5075,1940 5075,2110 4985,2200 U15.9
NetU8_50: U8.50 U15.8 | length 1787.8
  Top Layer w10: U8.50 3804.57,1580.43 3815,1570 3940,1570 4115,1745 4470,1745 4607,1882 4987,1882 5055,1950 5055,2100 4980,2175 U15.8
NetU8_60: U8.60 U15.3 | length 1266
  Top Layer w10: U8.60 4216.22,1876.22 4277,1937 4982,1937 5015,1970 5015,2015 4980,2050 U15.3
NetU8_61: U8.61 U15.2 | length 1195.8
  Top Layer w10: U8.61 4205.91,1895.91 4265,1955 4970,1955 4995,1980 4995,2005 4975,2025 U15.2
NetU8_62: U8.62 U15.1 | length 1013.6
  Top Layer w10: U8.62 4195.59,1915.59 4195.59,1917.28 4253.31,1975 4830,1975 4855,2000 U15.1
NetU8_63: U8.63 U15.56 | length 604.4
  Top Layer w10: U8.63 4187.1,1935.28 4251.82,2000 U15.56
NetU8_64: U8.64 U15.55 | length 606.7
  Top Layer w10: U8.64 4181.33,1954.96 4251.37,2025 U15.55
NetU8_65: U8.65 U15.54 | length 608.9
  Top Layer w10: U8.65 4175.56,1974.65 4250.91,2050 U15.54
NetU8_68: U8.68 U15.53 | length 594.7
  Top Layer w10: U8.68 4209.16,2033.7 4250.46,2075 U15.53
NetU8_69: U8.69 U15.52 | length 596.9
  Top Layer w10: U8.69 4203.39,2053.39 4250,2100 U15.52
NetU8_80: U8.80 U15.5 | length 1672.2
  Top Layer w10: U8.80 4230.08,2269.92 v1(4300,2200) ; v1(4300,1900) 4975,1900 5035,1960 5035,2050 4985,2100 U15.5
  Bottom Layer w12: v1(4300,1900) v1(4300,2200)
NetU8_87: U8.87 U15.46 | length 643
  Top Layer w10: U8.87 4167.28,2407.72 4325,2250 U15.46
NetU8_98: U8.98 U15.45 | length 722.3
  Top Layer w10: U8.98 4015.75,2624.25 4365,2275 U15.45
NetU8_99: U8.99 U15.44 | length 720.1
  Top Layer w10: U8.99 4021.52,2643.94 4365.46,2300 U15.44
NetU8_100: U8.100 U15.42 | length 707.5
  Top Layer w10: U8.100 4027.29,2663.62 4330.91,2360 4400.82,2360 4410.82,2350 U15.42
NetU8_103: U8.103 U15.40 | length 853.7
  Top Layer w10: U8.103 4262.32,2722.68 4280,2705 4280,2461.82 4341.82,2400 U15.40
NetU8_106: U8.106 U15.38 | length 1091.4
  Top Layer w10: U8.106 3824.25,2894.25 3840,2910 3875,2910 3985,2800 4215,2800 4298,2717 4298,2469.28 4317.28,2450 U15.38
NetU8_107: U8.107 U15.37 | length 1112.9
  Top Layer w10: U8.107 3804.57,2909.57 3825,2930 3880.46,2930 3990.46,2820 4225,2820 4316,2729 4316,2504 4345,2475 U15.37
NetU8_108: U8.108 U15.36 | length 1139
  Top Layer w10: U8.108 3784.88,2919.88 3815,2950 3885.91,2950 3995.91,2840 4235,2840 4334,2741 4334,2526 4360,2500 U15.36
NetU8_109: U8.109 U15.32 | length 1093
  Top Layer w10: U8.109 3765.2,2930.2 3805,2970 3891.37,2970 4001.37,2860 4245,2860 4352,2753 4352,2618 4370,2600 U15.32
NetU8_112: U8.112 U15.31 | length 1136
  Top Layer w10: U8.112 3706.14,2901.14 3795,2990 3896.82,2990 4006.82,2880 4255,2880 4370,2765 4370,2639 4384,2625 U15.31
NetU8_113: U8.113 U15.30 | length 1164.4
  Top Layer w10: U8.113 3686.46,2911.46 3785,3010 3902.28,3010 4012.28,2900 4265,2900 4388,2777 4388,2657 4395,2650 U15.30
NetU8_115: U8.115 U15.29 | length 1194
  Top Layer w10: U8.115 3647.09,2902.09 3775,3030 3907.73,3030 4017.73,2920 4275,2920 4406,2789 4406,2687 4418,2675 U15.29
NetU8_116: U8.116 U15.28 | length 1576.5
  Top Layer w10: U8.116 3627.4,2912.4 3765,3050 4175,3050 4525,2700 4610,2700 4635,2675 U15.28
NetU8_119: U8.119 U15.27 | length 1807.7
  Top Layer w10: U8.119 3568.35,2898.35 3740,3070 4180.46,3070 4530.46,2720 4970,2720 4985,2705 4985,2665 4970,2650 U15.27
NetU8_120: U8.120 U15.26 | length 1912.1
  Top Layer w10: U8.120 3548.66,2908.66 3730,3090 4185.91,3090 4535.91,2740 4980,2740 5005,2715 5005,2655 4975,2625 U15.26
NetU8_122: U8.122 U15.25 | length 2027.5
  Top Layer w10: U8.122 3509.29,2904.29 3715,3110 4191.37,3110 4541.37,2760 4990,2760 5025,2725 5025,2645 4980,2600 U15.25
NetU8_123: U8.123 U15.20 | length 2586.8
  Top Layer w10: U8.123 3489.61,2914.61 3705,3130 4196.82,3130 4546.82,2780 5105,2780 5220,2665 5220,2485 5190,2455 5030,2455 5010,2475 U15.20
NetU14_2: U14.2 U15.49 | length 837
  Top Layer w10: v1(4435,1670) 4439.8,1665.2 U14.2 ; v1(4435,2175) U15.49
  Bottom Layer w12: v1(4435,1670) v1(4435,2175)
TCK: J2.9 R25.2 | length 1244.8
  Top Layer w10: R25.2 2629,1640 2831,1438 2831,1234 2857,1208 2857,1104 2874,1087 2940,1087 2957,1104 2957,1164 2976,1183 3250,1183 3260,1173 3267,1173 J2.9
TDI: J2.5 R24.2 | length 1042
  Top Layer w10: R24.2 2585,1520 2620,1485 2620,1075 2639,1056 3071,1056 3100,1085 J2.5
TDO: J2.13 U8.157 | length 2405.9
  Top Layer w10: U8.157@2712.64,2742.36 U8.157 2741.57,2753.43 v1(2715,2780) ; v1(2960,1340) 3000,1300 3425,1300 3445,1280 3445,1195 J2.13
  Bottom Layer w10: v1(2715,2780) 2715,1390 2765,1340 v1(2960,1340)
TMS: J2.7 R27.2 | length 1067.6
  Top Layer w10: R27.2 2557.4,1067.6 2587,1038 3163,1038 3200,1075 J2.7
USB_VCCA33: C56.2 C57.2 C61.2 U12.5 U15.10 U15.14 | length 1874.4
  Top Layer w12: v1(4730,2225) U15.10 ; v1(4730,2325) U15.14
  Top Layer w25: v1(4730,3000) 5075,3000 5132.4,3057.4 U12.5 5262.2,3102.68 C61.2
  Bottom Layer w25: v1(4730,2325) v1(4730,2225) 4730,2360 v1(4730,3000)
USB_VCCD33: C50.2 C51.2 C52.2 C53.2 C54.2 C55.2 C60.2 R33.2 R34.2 U11.5 U14.3 U15.6 U15.18 U15.24 U15.34 U15.39 U15.50 U15.51 | length 8399
  Top Layer w10: U15.24 5037.6,2575 R33.2 5082.6,2637.6 5110,2665 5190,2665 5200,2655 5200,2542.6 R34.2
  Top Layer w12: U15.51 U15.50 v1(4662.4,2150) 4687.4,2125 U15.6 ; U15.39 v1(4662.4,2425) U15.18 ; U15.34 v1(4662.4,2550) 4687.4,2575 U15.24 ; v1(4662.4,1797.6) 4837.4,1797.6 4880,1755 C55.2 ; U14.3 4790.24,1797.36
  Top Layer w25: v1(4662.4,3107.68) 4777.2,3107.68 C60.2
  Bottom Layer w25: v1(4662.4,2150) v1(4662.4,1797.6) ; C52.2@4662.4,2160 v1(4662.4,1797.6) ; C51.2@4662.4,2280 v1(4662.4,1797.6) ; C53.2@4662.4,2420 v1(4662.4,1797.6) ; v1(4662.4,2425) v1(4662.4,1797.6) ; C54.2@4662.4,2540 v1(4662.4,1797.6) ; v1(4662.4,2550) v1(4662.4,1797.6) ; 4662.4,2660 v1(4662.4,1797.6) ; v1(4662.4,3107.68) 4662.4,3000 v1(4662.4,1797.6)
VCC5: C7.2 C17.2 C63.1 R30.2 R31.2 U1.1 U1.3 U2.1 U2.3 U4.3 U6.3 U7.3 U9.3 U11.1 U11.3 U12.1 U12.3 U13.2 | length 4964.9
  Top Layer w20: 4555,3530 4555,3210 4572.68,3192.32 U11.3 ; U11.1 4682.32,3192.32 4700,3210 4700,3535 ; 5015,3530 5015,3210 5037.68,3187.32 U12.3 ; U12.1 5157.32,3187.32 5175,3205 5175,3520
  Top Layer w25: 1245,2710 1370,2710 1400,2680 U4.3 ; 1295,2710 1295,2500 v1(1297.6,2497.4)
  Top Layer w35: 1245,2710 1120,2835 1120,3305 1255,3440 1540,3440 U13.2 ; R30.2 5795,3520
  Top Layer w50: C63.1 2100,3700
  Bottom Layer w20: U1.1 2082.6,3182.6 2100,3200 2585,3200 2597.4,3187.6 U2.3 ; U1.3 2157.4,3197.6 ; U2.1 2522.6,3197.4
  Bottom Layer w25: v1(1297.6,2497.4) C17.2
  Bottom Layer w30: 2100,3200 C63.1
VCC12: C22.2 C23.2 C24.2 C25.2 C48.1 U8.13 U8.67 U8.117 U8.170 U9.2 | length 5027.4
  Top Layer w10: U8.170 2988.54,2486.46 3115,2360 v1(3180,2360) ; U8.13 3076.22,1856.22 3190,1970 v1(3190,2080) ; v1(3515,2130) 3625,2130 3740.98,2014.02 U8.67 ; v1(3520,2360) 3520,2520 3607.72,2607.72 U8.117
  Bottom Layer w50: v1@3185,2080 v1@3185,2075 ; v1@3190,2075 v1@3185,2075 ; C23.2@3260,2075 v1@3185,2075 ; 3455,2365 3515,2365 3515,2360 3515,2075 ; v1(3515,2130) 3515,2075 ; C25.2@3515,2300 3515,2075 ; U9.2 3900,3500 3340,2940 3340,2365 3260,2365 3185,2365 3185,2360 v1@3185,2075 ; v1@3185,2075 3440,2075 3515,2075
VCC25: C26.2 C27.2 C28.2 C29.2 C30.2 C31.2 C32.2 C33.2 C47.1 R17.2 R29.2 R35.1 U7.2 U8.7 U8.44 U8.66 U8.92 U8.111 U8.149 U8.166 U8.195 | length 6597.5
  Top Layer w10: U8.195 3094.33,1994.33 v1(3120,2020) 3120,1950 2958.11,1788.11 U8.7 ; U8.166 2979.8,2565.2 v1(3125,2420) ; U8.149 v1(2977.8,2742.2) 3020,2700 v1(3265,2700) ; v1(3570,2010) 3686.46,1893.54 U8.44 3686.46,1543.86 R17.2 ; v1(3580,2075) 3635,2075 3715.67,1994.33 U8.66 ; v1(3660,1757.4) 3660,1755 3686.46,1755 ; v1(3723.42,2742.6) v1@3725.83,2745 ; U8.111 3725.83,2570.83 3661.14,2506.14 U8.92 ; 3820,1994.33 3820,1980 v1(3822.6,1980)
  Top Layer w12: R29.2 3097.4,3400 C47.1
  Top Layer w20: v1(3580,2425) 3661.14,2506.14
  Bottom Layer w10: C32.2 v1(3723.42,2742.6)
  Bottom Layer w20: R35.1 3197.6,3522.6
  Bottom Layer w50: U7.2 3200,3115 3265,3050 3265,2430 3120,2430 3120,2010 3580,2010 3580,2435 3455,2435
  other v1: 2958.11,1740 2855,1994.33 3825,2506.14 2855,2565.2
VCC33: C34.2 C35.2 C36.2 C37.2 C38.2 C39.2 C40.2 C41.2 C42.2 C43.2 C44.2 C45.2 C46.1 J2.1 J2.2 R18.1 R19.1 R20.1 R21.2 R23.2 U5.1 U5.4 U6.2 U8.21 U8.38 U8.46 U8.59 U8.73 U8.88 U8.114 U8.125 U8.143 U8.176 U8.191 U8.201 U10.5 | length 13757.8
  Top Layer w10: U5.1 2306.93,2041.58 2306.93,2073.07 ; v1(2240,2140) 2306.93,2073.07 ; U8.201 2981.22,1876.22 v1(3050,1945) ; U8.176 v1(3048.35,2368.35) ; v1(3048.07,2073.07) U8.191 2306.93,2073.07 ; U8.143 3095.91,2769.09 3125,2740 v1(3190,2740) ; v1(3190,2630) 3375,2630 3450.24,2705.24 U8.125 ; U8.21 v1(3233.7,1943.7) ; U8.38 v1(3568.35,1941.65) ; v1(3580,2500) 3666.77,2586.77 U8.114 ; v1(3650,2160) 3677.87,2132.13 U8.73 ; v1(3652.6,2427.4) U8.88 ; U8.46 3725.83,1929.17 3798.46,1856.54 U8.59 4193.46,1856.54 4217.4,1832.6 R23.2
  Top Layer w12: U10.5 2952.36,3197.4 2802.6,3197.4 C46.1 2700,3500 4017.4,3500 R18.1 R20.1 ; 3233.7,1513.7 U8.21
  Top Layer w20: v1(3655,2000) 3725.83,1929.17
  Top Layer w25: J2.1 J2.2 2900,1355 2965,1420 3140,1420 3233.7,1513.7
  Bottom Layer w50: U6.2 2500,3500 2955,3045 3100,3045 3190,2955 3190,2580 3190,2500 3050,2500 3050,2368.35 v1(3050,1945) ; C35.2@3050,2073.07 v1(3050,1945) ; C34.2@3050,2320 v1(3050,1945) ; C36.2@3057.4,1945 v1(3050,1945) ; C37.2@3233.7,1945 v1(3050,1945) ; C37.2@3240,1945 v1(3050,1945) ; C44.2@3460,2500 C44.2@3455,2500 ; v1(3580,2500) C44.2@3455,2500 ; C40.2@3650,2000 3650,1945 ; v1(3650,2160) 3650,1945 ; C42.2@3650,2400 3650,1945 ; v1(3050,1945) C39.2@3568.35,1945 ; v1(3050,1945) C39.2@3568.35,1945 ; C44.2@3455,2500 3640,2500 3650,2500 3650,2427.4 3650,1945 ; C39.2@3568.35,1945 3650,1945
VCCA33: C3.2 C4.2 C5.2 C6.2 C13.2 R12.1 U1.5 U3.5 U3.7 U3.9 U3.15 U3.22 U3.24 U3.26 U3.28 U3.33 U3.34 U3.37 U3.39 | length 4773.5
  Top Layer w10: v1(1886.38,2613.62) U3.24 ; v1(1887.01,2652.99) U3.22 ; U3.28 1900.12,2534.88 1885.75,2549.25 v1(1885.75,2574.25) U3.26 ; U3.33 2064.73,2290.27 v1(2084.41,2270.59) U3.34 ; U3.15 v1(2084.41,2995.59) ; U3.37 v1(2143.47,2271.53) 2182.84,2310.9 U3.39 ; U3.9 2202.52,2933.74 v1(2241.89,2973.11) U3.7 ; U3.5 v1(2281.26,2973.74)
  Bottom Layer w20: v1(1667.4,2180) 1782.4,2295 1885,2295
  Bottom Layer w25: v1@1885,2575 v1(1885.75,2574.25) ; C5.2@1885,2613.62 1885,2295 ; v1@1885,2652.99 1885,2295 ; v1(1886.38,2613.62) 1885,2615 1885,2295 ; v1(1887.01,2652.99) v1@1885,2655 ; C3.2@2080,2270 1910,2270 ; C3.2@2084.41,2270 1910,2270 ; v1(2084.41,2270.59) 2085,2270 1910,2270 ; v1(2143.47,2271.53) 2145,2270 2143.47,2270 1910,2270 ; 2200,2975 2105,2975 ; 2202.52,2975 2105,2975 ; C4.2@2280,2975 2241.89,2975 2105,2975 ; 1885,2295 1910,2270 ; 1885,2295 v1@1885,2655 ; v1@1885,2655 1885,2785 1940,2840 C13.2 1952.8,3037.68 U1.5 2082.6,2997.4 v1(2084.41,2995.59) 2105,2975
VCCD33: C1.2 C2.2 C14.2 JP1.1 R1.2 R2.2 U2.5 U3.41 U3.49 U3.58 | length 3592.9
  Top Layer w10: R2.2 2117.6,1262.6 2200,1345 JP1.1@2200,1410 ; R1.2 2120,1950 2195,1875 v1(2300,1875) ; U3.41 2222.21,2267.79 2270,2220 v1(2300,2220) ; U3.49 v1(2521.46,2456.14) ; U3.58 v1(2520.91,2633.31)
  Bottom Layer w10: JP1.1 2240,1400 2300,1460 v1(2300,2220)
  Bottom Layer w25: v1(2300,2220) 2360,2220 2445,2220 2522.6,2297.6 ; C14.2 2392.8,3037.68 U2.5 2522.6,2633.31 2522.6,2297.6 ; v1(2521.46,2456.14) 2522.6,2455 2522.6,2297.6 ; C1.2@2522.6,2456.14 2522.6,2297.6 ; C1.2@2522.6,2460 2522.6,2297.6
pads on no net: J1. J2.3 J2.15 J2.17 J2.19 J3.3 J4. J4.1 U3.44 U3.45 U4.7 U8.2 U8.3 U8.4 U8.5 U8.6 U8.8 U8.9 U8.11 U8.12 U8.14 U8.15 U8.16 U8.18 U8.19 U8.20 U8.22 U8.23 U8.24 U8.25 U8.26 U8.28 U8.29 U8.30 U8.31 U8.32 U8.33 U8.34 U8.35 U8.36 U8.39 U8.40 U8.41 U8.42 U8.43 U8.45 U8.47 U8.48 U8.51 U8.54 U8.55 U8.57 U8.58 U8.71 U8.72 U8.74 U8.75 U8.76 U8.77 U8.78 U8.82 U8.83 U8.89 U8.90 U8.91 U8.93 U8.94 U8.96 U8.97 U8.101 U8.110 U8.118 U8.124 U8.126 U8.127 U8.128 U8.129 U8.130 U8.132 U8.133 U8.134 U8.135 U8.136 U8.137 U8.138 U8.139 U8.140 U8.142 U8.144 U8.145 U8.146 U8.147 U8.148 U8.150 U8.151 U8.152 U8.153 U8.154 U8.175 U8.178 U8.179 U8.180 U8.181 U8.184 U8.187 U8.189 U8.190 U8.192 U8.193 U8.194 U8.196 U8.197 U8.199 U8.200 U8.204

## Polygon pours and split planes (outlines as drawn)
VCC5 on Top Layer (hatched 90Degree grid 7 track 8, remove dead copper): 1598.82,3496.82 1598.82,3852 5854,3852 5854,3497 4399,3497 4299,3597 1799,3597 1699,3497 1598.82,3497
GND on Bottom Layer (hatched 90Degree grid 10 track 11, remove dead copper): 1025,3851.13 5860,3851.13 5860,1016.13 1025,1016.13

## Keep-outs
Keep-Out Layer:
  lines w10: 1020,1020 1020,3855 5855,3855 5855,1020 1020,1020

## Silkscreen, mask and mechanical layers (free items; w line width, h text height)
Top Overlay:
  circle w10: c5175,1105 r60.21
  text "1.2V" at 3670,3630 h60 r90
  text "3.3V" at 2270,3625 h60 r90
  text "2.5V" at 2970,3625 h60 r90
  text "0" at 4520,3530 h60
  text "1" at 4630,3530 h60
  text "2" at 4720,3530 h60
  text "5.0V" at 1470,3525 h60 r90
  text "USB 2.0" at 5290,2240 h60 r90
  text "SoRAD" at 1275,2120 h200 r90.32
  text "ChameleonPOD" at 2700,1395 h60
  text "ANT." at 1380,1345 h60
  text "Chris Hiszpanski, C 2007" at 4105,1075 h60
Mechanical 1:
  lines w10: 1000,890 1000,910 ; 1060,880 1000,900 ; 1060,920 1000,900 ; 3156.59,900 1000,900 ; 3718.41,900 5875,900 ; 5815,880 5875,900 ; 5815,920 5875,900 ; 5875,890 5875,910 ; 5980,1060 6000,1000 ; 5980,3815 6000,3875 ; 5990,1000 6010,1000 ; 5990,3875 6010,3875 ; 6000,2156.59 6000,1000 ; 6000,2718.41 6000,3875 ; 6020,1060 6000,1000 ; 6020,3815 6000,3875
  text "2875 (mil)" at 6035.99,2166.59 h60 r90
  text "4875 (mil)" at 3166.59,864.01 h60

## Text inside footprints (layer, text, board x,y; h text height)
J2: Top Overlay "2" at 2800,1220 h50; Top Overlay "1" at 2800,1120 h50; Top Overlay "19" at 3860,1120 h50; Top Overlay "20" at 3860,1220 h50
JP1: Top Overlay "2" at 2120,1300 h50 r90; Top Overlay "1" at 2220,1320 h50 r90; Top Overlay "7" at 2220,1760 h50 r90; Top Overlay "8" at 2120,1760 h50 r90
U6: Top Overlay "2" at 2480.32,3549.41 h59.06; Top Overlay "1" at 2390.16,3549.41 h59.06; Top Overlay "3" at 2580.32,3549.41 h59.06
U7: Top Overlay "2" at 3180.32,3549.41 h59.06; Top Overlay "1" at 3090.16,3549.41 h59.06; Top Overlay "3" at 3280.32,3549.41 h59.06
U9: Top Overlay "2" at 3880.32,3549.41 h59.06; Top Overlay "1" at 3790.16,3549.41 h59.06; Top Overlay "3" at 3980.32,3549.41 h59.06
U13: Top Overlay "2" at 1680.32,3449.41 h59.06; Top Overlay "1" at 1590.16,3449.41 h59.06; Top Overlay "3" at 1780.32,3449.41 h59.06